# Altium PCB 智能插座2019_1_7.PcbDoc
Units mil, origin at the board's own origin, x right, y up, seen from the top; angles counter-clockwise.
Board outline 3149.61 x 3089.41 mil, 2 copper layers (Top Layer, Bottom Layer); 88 components, 65 nets, 285 pads, 72 vias.
Unrouted connection lines stored in the file: 56.
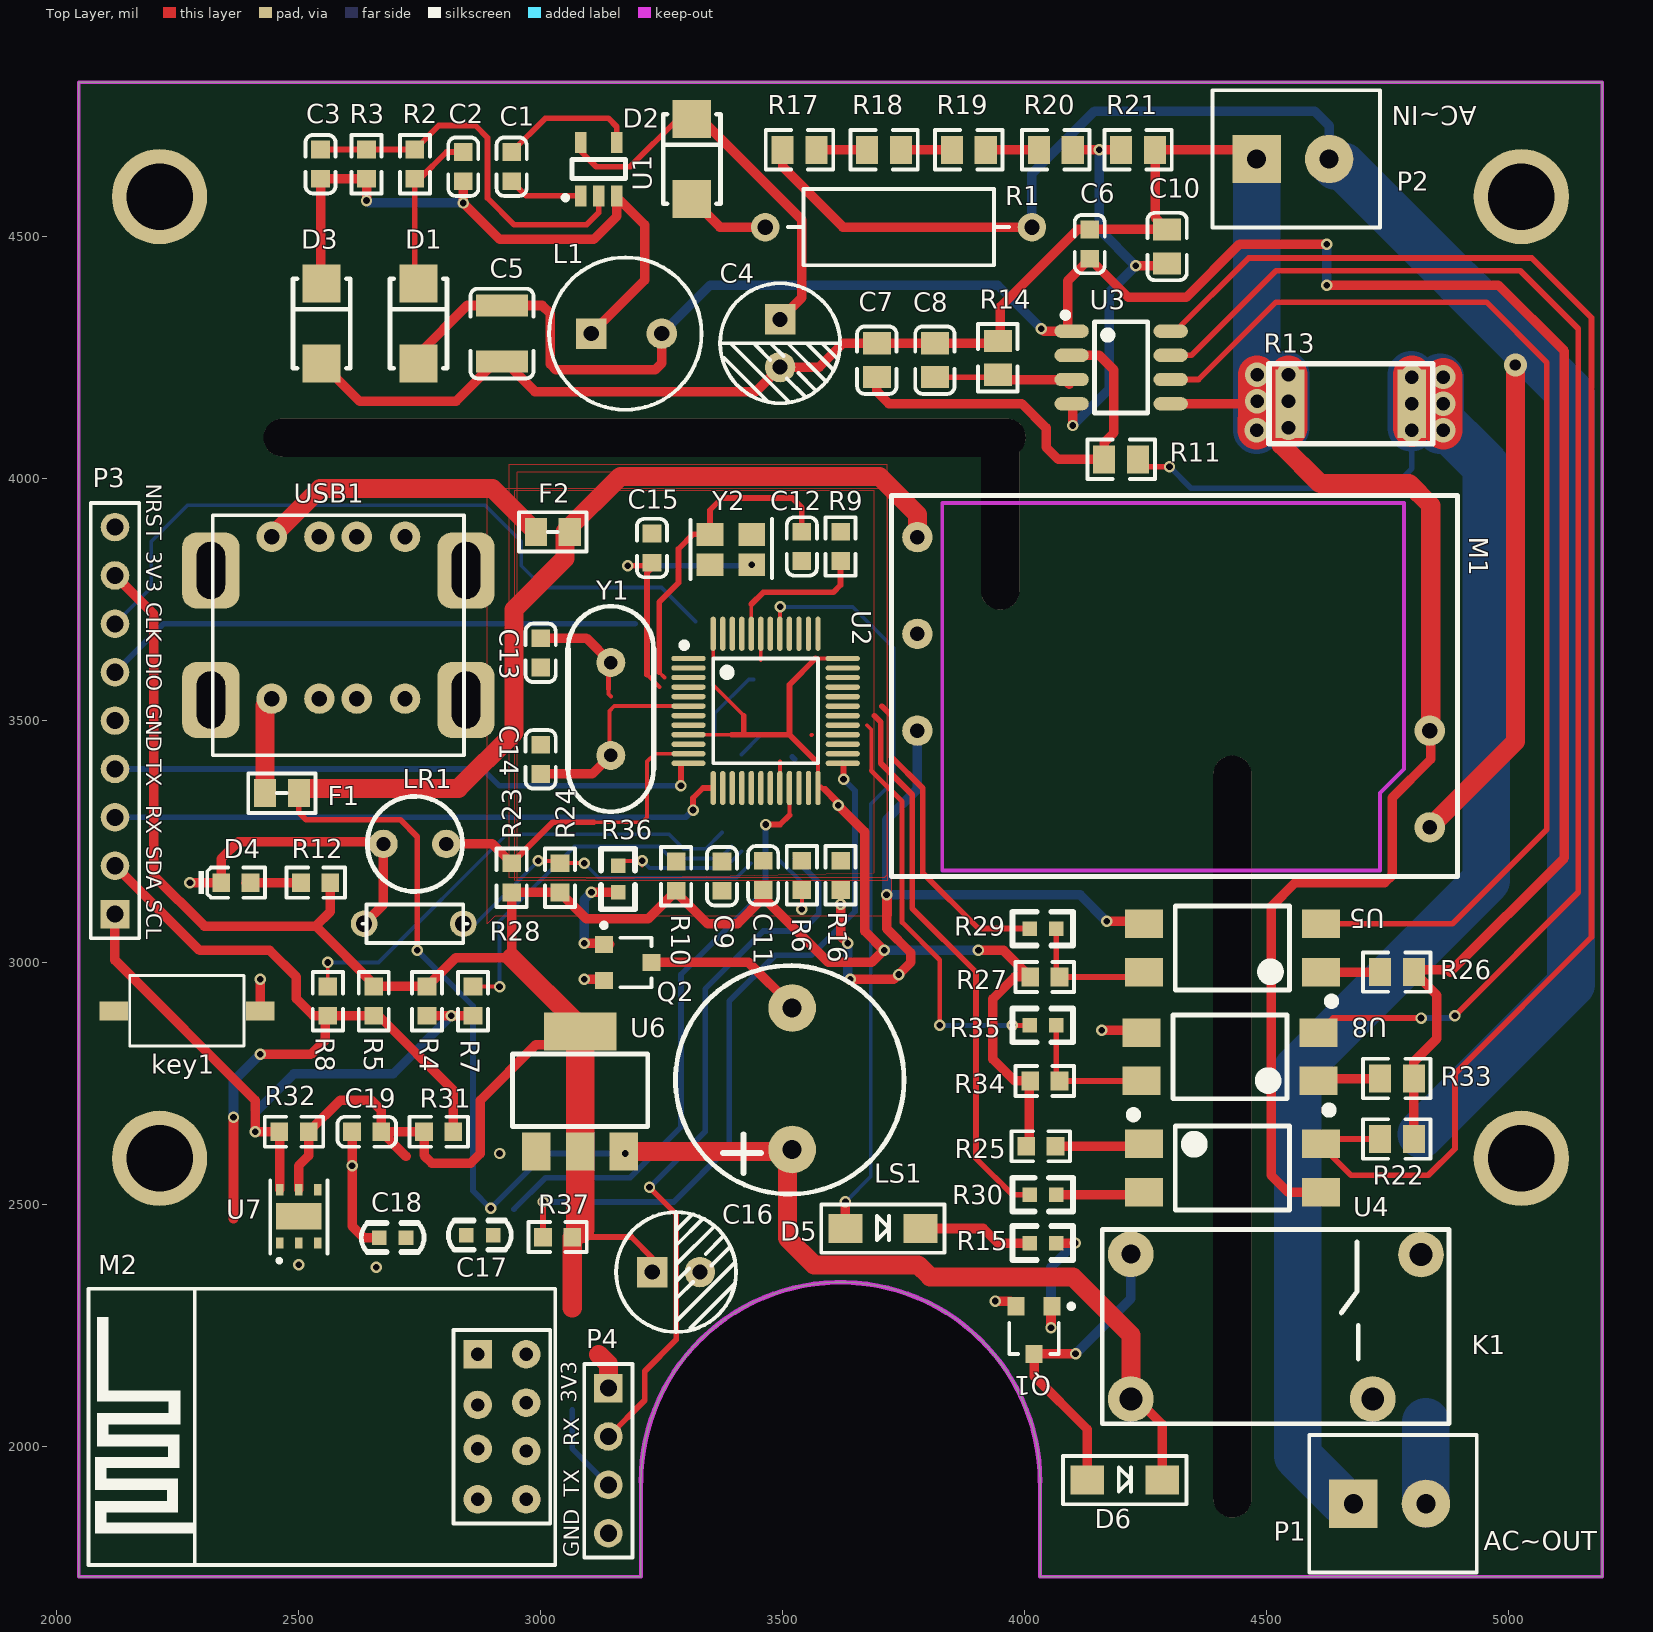
[diagram p0: Top Layer view]
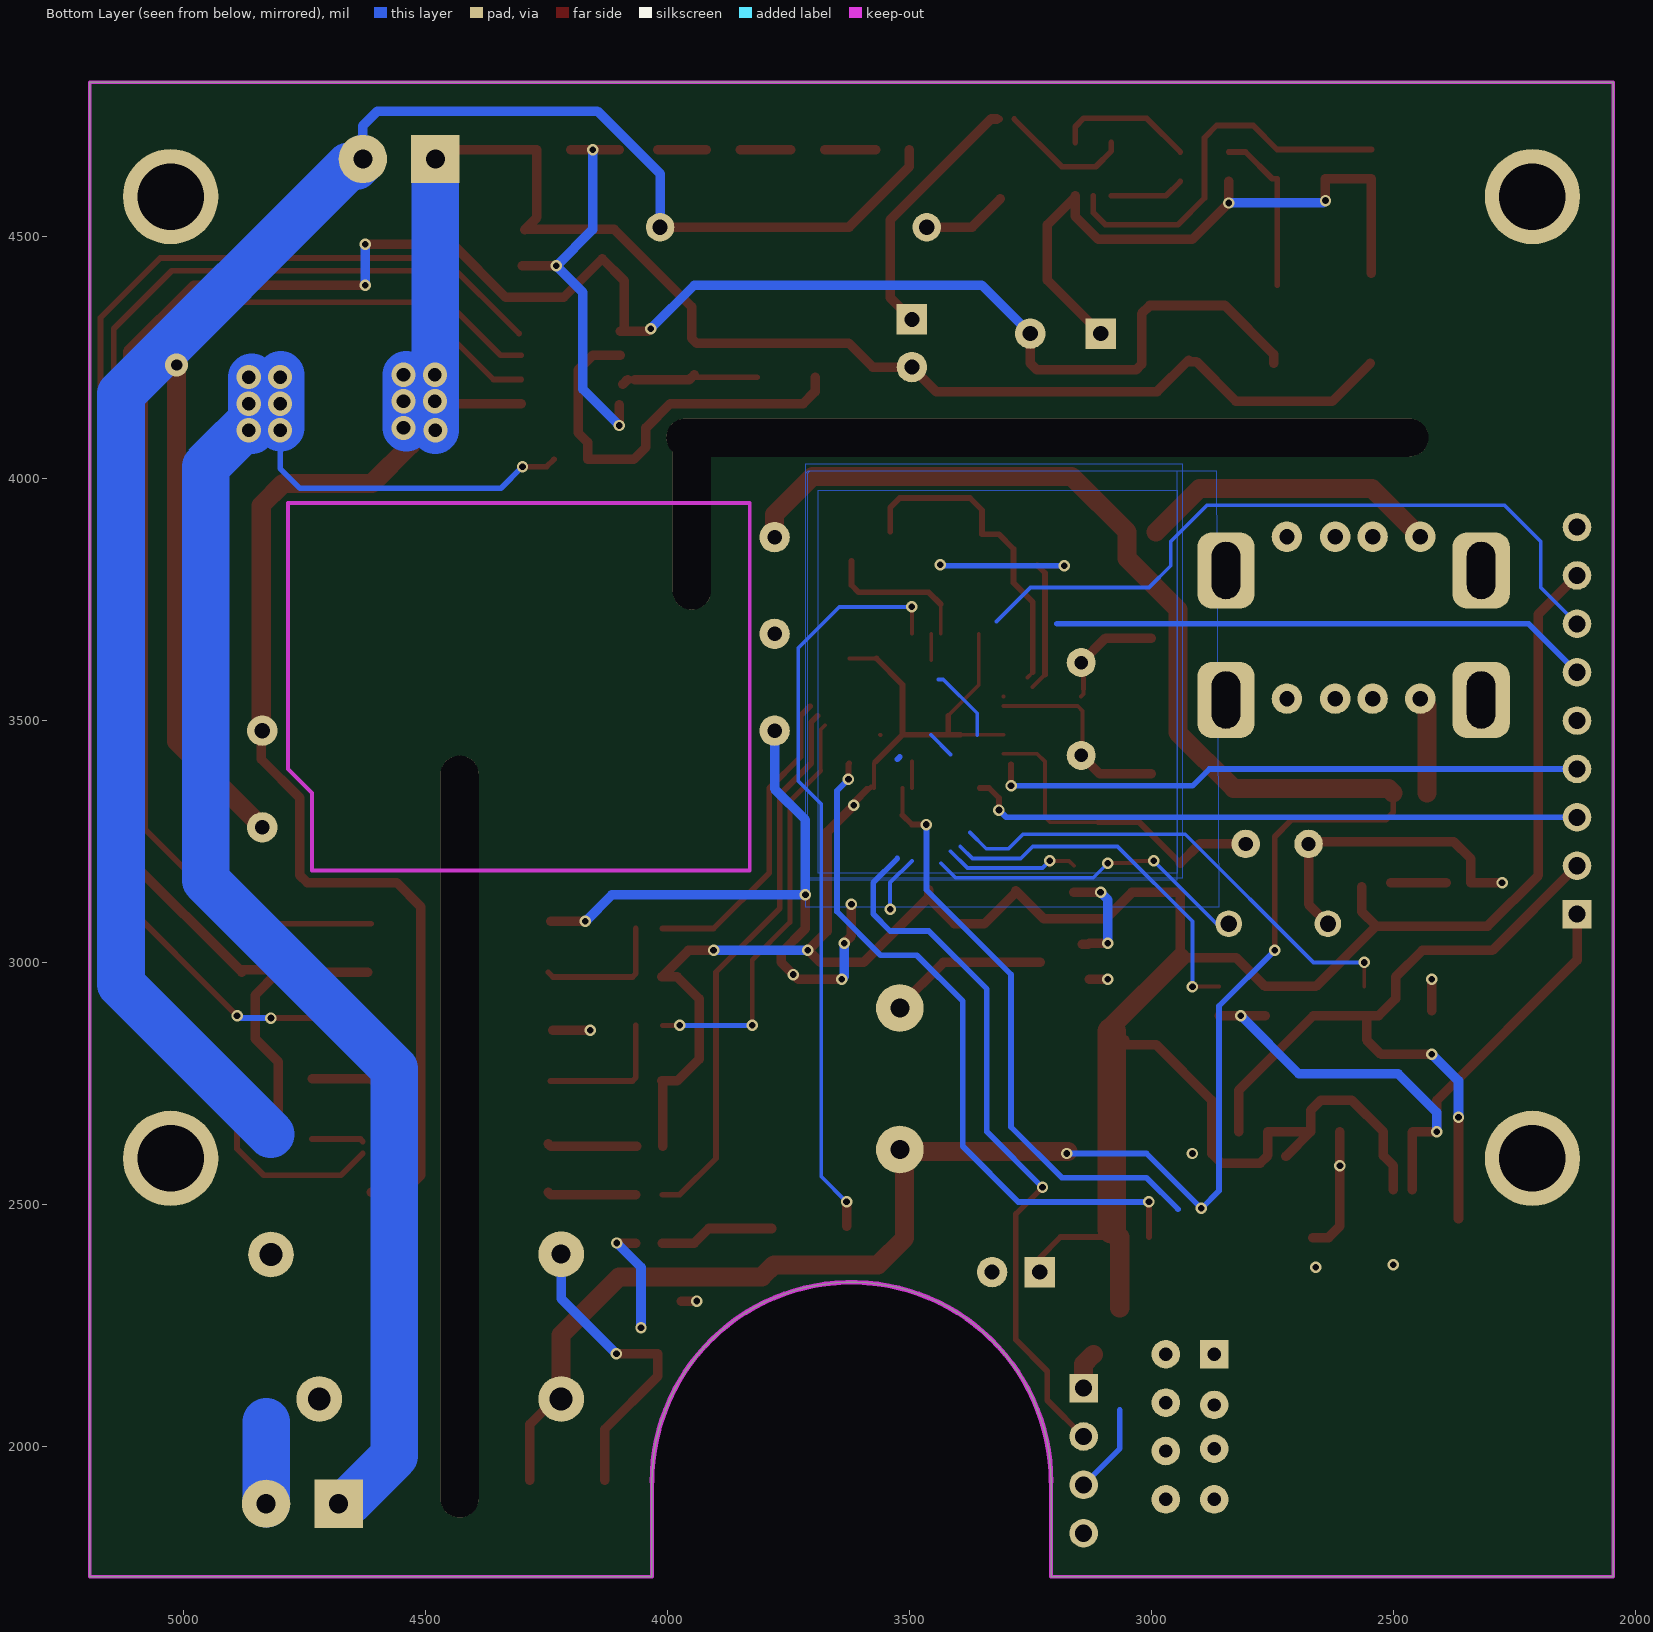
[diagram p1: Bottom Layer view, seen from below]

## Layer stack, top to bottom
Top Solder: solder mask 0.4, Solder Resist, Dk 3.5
Top Layer: signal copper 1.4
Dielectric1: dielectric 12.6, FR-4, Dk 4.8
Bottom Layer: signal copper 1.4
Bottom Solder: solder mask 0.4, Solder Resist, Dk 3.5

## Board outline
2045,1730 2045,4819.41 5194.61,4819.41 5194.61,1730 4032.32,1730 4032.32,1925.71 ccw(c3619.84,1926.42) 3207.36,1925.71 3207.36,1730.04 3207.32,1730

## Design rules (kind name [scope] priority, off if disabled: settings)
Clearance [All] p1: gap=10 ignorepadtopadclearanceinfootprint=FALSE except(0: Arc-Hole Track-Hole SMDPad-Hole THPad-Hole Via-Hole Fill-Hole Poly-Hole Region-Hole Text-Hole)
FabricationTestPointUsage TestPointUsage [All] p1: valid=0 allowmultiple=FALSE
FabricationTestpoint Testpoint [All] p1: side=3 testpointundercomponent=TRUE minsize=40 maxsize=100 preferedsize=60 minholesize=0 maxholesize=40 preferedholesize=32 testpointgrid=1 allowsidetop=TRUE allowsidebottom=TRUE usegrid=TRUE gridtolerance=0.01
PolygonConnect [All] p1: connectstyle=Relief reliefconductorwidth=10 reliefentries=4 polygonreliefangle="90 Angle" airgapwidth=10
RoutingVias [All] p1 off: holewidth=28 width=50 viastyle="Through Hole" minholewidth=28 minwidth=50 maxholewidth=28 maxwidth=50
SolderMaskExpansion [All] p1: expansion=4
Width [All] p1: maxlimit=118.11 minlimit=7.87 preferedwidth=19.68
28 further rules are at their usual default settings.

## Components (designator, comment, footprint, x,y, rotation, side; value= is the part's Value field where it differs from the comment)
C1 "2.2μF/10V" LC-0603_C 2940,4645 r270 top value="100nF (104) ±10% 50V"
C2 "220nF" LC-0603_C 2840,4645 r90 top value="100nF (104) ±10% 50V"
C3 "470pF" LC-0603_C 2545,4650.32 r90 top value="100nF (104) ±10% 50V"
C4 "3.3μF/400V" CAP-ELECT-TH-6.3X7 3495,4280 r270 top value=2.2μF/400V
C5 "100μF" LC-1210_C 2920,4300 r90 top value="100nF (104) ±10% 50V"
C6 "0.1μF" LC-0603_C 4135,4485 r90 top value="100nF (104) ±10% 50V"
C7 "33nF" LC-0805_C 3695,4245 r90 top value="100nF (104) ±10% 50V"
C8 "33nF" LC-0805_C 3815,4245 r270 top value="100nF (104) ±10% 50V"
C9 "0.1μF" LC-0603_C 3375,3178.37 r90 top
C10 "33nF" LC-0805_C 4295,4480 r90 top value="100nF (104) ±10% 50V"
C11 "0.1μF" LC-0603_C 3460,3180 r270 top
C12 "6pF" LC-0603_C 3540,3860 r270 top
C13 "20pF" LC-0603_C 3000,3640 r270 top
C14 "20pF" LC-0603_C 3000,3420 r90 top
C15 "6pF" LC-0603_C 3230,3856.61 r90 top
C16 "1000μF/400V" CAP-ELECT-TH-6.3X7 3280,2360 r0 top value=2.2μF/400V
C17 "104" 0603C 2880,2435 r0 top
C18 "104" 0603C 2700,2430 r0 top
C19 "0.1μF" LC-0603_C 2640.43,2649.96 r0 top
D1 "1N4007" LC-SMA(DO-214AC)_S1 2755,4320 r270 top
D2 "1N4007" LC-SMA(DO-214AC)_S1 3320,4660 r270 top
D3 "US1J(600V 1A)" LC-SMA(DO-214AC)_S1 2555,4320 r270 top
D4 "POWER" LC-0603_LED_S1 2370,3165 r0 top value=红色
D5 "IN4148" 1206D 3580,2420 r90 top
D6 "" 1206D 4080,1900 r90 top
F1 "1.1A  自恢复保险丝" AFUSE 2460,3360 r180 top
F2 "1.1A  自恢复保险丝" AFUSE 3020,3900 r180 top
K1 "Relay-5V" SJ-S-105LMH 4220,2200 r0 top
key1 "SW" KEY-2 2420,2900 r180 top
L1 "1mH" L-10X14 3175,4300 r0 top
LR1 "光敏电阻" GUANGMIN 2740,3245 r180 top
LS1 "BUZZER 5V" BUZZER 3520,2760 r270 top
M1 "ACDC_THX208based" ACDC_THX208 4895,3180 r180 top
M2 "ESP-01&01S Module" "ESP-01&01S Module" 2920,2040 r90 top
P1 "Header" 3.81-2P 4680,1880 r0 top
P2 "Header" 3.81-2P 4480,4660 r0 top
P3 "Header 9" HDR1X9 2120,3100 r90 top
P4 "Header 4" HDR1X4 3140,2120 r270 top
Q1 "S8050" SOT-23 4020,2240 r180 top
Q2 "S8050" SOT-23 3180,3000 r270 top
R1 "39Ω/1W" R-1W-THT 3740,4520 r180 top
R2 "5.49KΩ" LC-0603_R 2740,4650.32 r270 top
R3 "4.99KΩ" LC-0603_R 2640,4650.31 r90 top
R4 "4.7KΩ" LC-0603_R 2765,2920 r270 top
R5 "4.7KΩ" LC-0603_R 2655,2920 r270 top
R6 "10KΩ" LC-0603_R 3540,3180 r270 top
R7 "100" LC-0603_R 2860,2920 r90 top
R8 "100" LC-0603_R 2560,2920 r90 top
R9 "10KΩ" LC-0603_R 3620,3860 r90 top
R10 "10KΩ" LC-0603_R 3280,3178.37 r270 top
R11 "1KΩ,1%" LC-0805_R 4200,4040 r0 top
R12 "1.5KΩ" LC-0603_R 2535,3165 r0 top
R13 "2mΩ/25A" R2512 4675,4155 r180 top
R14 "1KΩ,1%" LC-0805_R 3945,4250 r90 top
R15 "Res2" 0603 4065.61,2420 r180 top value=4.7K
R16 "0Ω" LC-0603_R 3620,3180 r90 top
R17 "470KΩ,1%" LC-0805_R 3535,4680 r180 top
R18 "470KΩ,1%" LC-0805_R 3710,4680 r180 top
R19 "470KΩ,1%" LC-0805_R 3885,4680 r180 top
R20 "470KΩ,1%" LC-0805_R 4065,4680 r180 top
R21 "1KΩ,1%" LC-0805_R 4235,4680 r0 top
R22 "1KΩ,1%" LC-0805_R 4769.96,2635 r0 top
R23 "10KΩ 1%" LC-0603_R 2940,3175 r270 top
R24 "10KΩ 1%" LC-0603_R 3040,3175 r270 top
R25 "2.2KΩ" LC-0603_R 4033.99,2620 r180 top
R26 "1KΩ,1%" LC-0805_R 4769.96,2980 r0 top
R27 "2.2KΩ" LC-0603_R 4042.25,2970 r180 top
R28 "MF52-10K   3950 1％" AXIAL-0.3 2740,3080 r180 top value=MF52-10K
R29 "0Ω/1W" 0603 4065.61,3070 r180 top
R30 "0Ω/1W" 0603 4010.61,2520 r0 top
R31 "10KΩ" LC-0603_R 2789.17,2649.96 r0 top
R32 "10KΩ" LC-0603_R 2490,2650 r180 top
R33 "1KΩ,1%" LC-0805_R 4769.96,2760 r0 top
R34 "2.2KΩ" LC-0603_R 4042.25,2755 r180 top
R35 "0Ω/1W" 0603 4065.61,2870 r180 top
R36 "4.7K" 0603 3160,3200 r270 top
R37 "4.7KΩ" LC-0603_R 3035,2432.22 r0 top
U1 "MP150" LC-SOT-23-5 3120,4640 r270 top
U2 "STM32F103C8T6" LC-LQFP-48_7x7x05P 3465,3520 r270 top
U3 "HLW8032" LC-SOP-8_150mil 4200,4230 r270 top
U4 "PC817" LC-SMD-4 4430,2575 r0 top
U5 "PC817" LC-SMD-4 4430,3030 r180 top
U6 "LM1117-3.3V" SOT-223/P2.3 3080,2720 r90 top
U7 "SHT1" SHT2X 2500,2420 r0 top
U8 "PC817" LC-SMD-4 4425,2805 r180 top
USB1 "2_USB" 2_USB 2600,3880 r180 top
Y1 "8M" 49/U_N 3145,3620 r270 top value="25MHz ±20ppm 20pF"
Y2 "32.768K" 0SC_3225 3390,3860 r180 top

## Footprints (in the part's own frame and the unit in brackets; to place one, negate y for a bottom-side part, rotate by r counter-clockwise, add the part's x,y. Pads: shape width x height; smd on the part's side, far side on the other; paste and mask are expansions set on the pad)
0SC_3225 [mm]
  rect 1.4x1.2 smd: 1(-1.184,0.965) 2(1.016,-0.635) GND(-1.184,-0.635) GND(1.016,0.965)
  silkscreen extent -2.24,-1.45 2.03,1.7
2_USB [mm]
  rrect50% 3x4 hole 1.5 slot 3 at 90 deg: 0(-6.24,8.57) 0(-6.24,1.77) 0(7.16,8.57) 0(7.16,1.77)
  round 1.6 hole 0.8: 1(3.96,8.5) 2(-0.508,8.5) 3(1.46,8.5) 4(-3.04,8.5) 5(3.96,0) 6(-0.508,0) 7(1.46,0) 8(-3.04,0)
  silkscreen extent -6.14,-1.13 7.06,11.47
3.81-2P [mil]
  rect 100x100 hole 39.37: 1(0,0.99)
  round 100 hole 39.37: 2(150,1)
  silkscreen extent -91,-141 255,143
49/U_N [mil]
  round 60 hole 28: 1(0,0) 2(192,0)
  silkscreen extent -116,-88 308,89, body extent -117,-88 309,89, height 512
0603 [mil]
  rect 30x30 smd: 1(0,0) 2(55,0)
  silkscreen extent -35,-35 90,35
0603C [mil]
  rect 30x30 smd: 1(21.61,1.26) 2(-33.39,1.26)
  silkscreen extent -71,-29 59,31
1206D [mil]
  rect 60x70 smd: 1(30,-50) 2(30,-205)
  silkscreen extent -20,-255 80,0
ACDC_THX208 [mm]
  round 1.6 hole 0.762: 1(1.45,-2.52) 3(28.35,-7.6) 4(28.35,-12.68) 5(28.35,-17.76)
  round 1.6 hole 0.8: 2(1.45,-7.6)
  silkscreen extent 0,-19.94 29.72,0.06
AFUSE [mm]
  rect 1.16x1.47 smd: 1(-1.017,0.254) 2(0.763,0.254)
  silkscreen extent -1.9,-0.78 1.64,1.29, body extent -1.12,-0.37 0.88,0.88, height 0.49
AXIAL-0.3 [mm] "Resistor; 2 Leads"
  round 1.4 hole 0.85: 1(-2.54,0) 2(2.667,0)
  silkscreen extent -2.77,-1.02 2.77,1.02
BUZZER [mm]
  round 2.5 hole 1: 1(3.728,0) 2(-3.703,0)
  silkscreen extent -5.93,-6.12 6.07,5.87
CAP-ELECT-TH-6.3X7 [mm]
  rect 1.6x1.6 hole 0.8: 1(-1.25,0)
  round 1.6 hole 0.8: 2(1.25,0)
  silkscreen extent -3.15,-3.15 3.15,3.15
"ESP-01&01S Module" [mm]
  rect 1.5x1.5 hole 0.7: 1(3.81,1.27)
  round 1.5 hole 0.7: 2(1.15,1.27) 3(-1.15,1.27) 4(-3.81,1.27) 5(3.81,-1.27) 6(1.27,-1.27) 7(-1.27,-1.27) 8(-3.81,-1.27)
  silkscreen extent -7.25,-2.79 7.25,21.71
GUANGMIN [mm]
  round 1.5 hole 0.75: 1(-1.651,0) 2(1.651,0)
  silkscreen extent -2.5,-2.5 2.5,2.5
HDR1X4 [mm] "Connector; Header; 4 Position"
  rect 1.5x1.5 hole 0.9: 1(0,0)
  round 1.5 hole 0.9: 2(2.54,0) 3(5.08,0) 4(7.62,0)
  silkscreen extent -1.27,-1.27 8.89,1.27
HDR1X9 [mm] "Connector; Header; 9 Position"
  rect 1.5x1.5 hole 0.9: 1(0,0)
  round 1.5 hole 0.9: 2(2.54,0) 3(5.08,0) 4(7.62,0) 5(10.16,0) 6(12.7,0) 7(15.24,0) 8(17.78,0) 9(20.32,0)
  silkscreen extent -1.27,-1.27 21.59,1.27
KEY-2 [mm]
  rect 1.5x1 smd: 1(-0.005,-0.001) 2(7.685,-0.001)
  silkscreen extent 0.85,-1.85 6.85,1.86
L-10X14 [mm]
  rect 1.6x1.6 hole 0.8: 1(-1.786,0)
  round 1.6 hole 0.8: 2(1.913,0)
  silkscreen extent -4,-4 4,4
LC-0603_C [mm]
  rect 0.93x0.98 smd: 1(-0.77,0) 2(0.77,0)
  silkscreen extent -1.54,-0.79 1.54,0.79, body extent -0.8,-0.4 0.8,0.4, height 0.3
LC-0603_LED_S1 [mm]
  rect 0.93x0.98 smd: A(0.77,0) K(-0.77,0)
  silkscreen extent -1.97,-0.79 1.53,0.79, body extent -0.8,-0.4 0.8,0.4, height 0.6
LC-0603_R [mm]
  rect 0.93x0.98 smd: 1(-0.77,0) 2(0.77,0)
  silkscreen extent -1.53,-0.79 1.54,0.79, body extent -0.85,-0.4 0.85,0.4, height 0.56
LC-0805_C [mm]
  rect 1.16x1.47 smd: 1(-0.89,0) 2(0.89,0)
  silkscreen extent -1.77,-1.04 1.77,1.04, body extent -1,-0.62 1,0.63, height 0.77
LC-0805_R [mm]
  rect 1.16x1.47 smd: 1(-0.89,0) 2(0.89,0)
  silkscreen extent -1.77,-1.03 1.77,1.04, body extent -1,-0.62 1,0.63, height 0.49
LC-1210_C [mm]
  rect 1.16x2.72 smd: 1(-1.475,0) 2(1.475,0)
  silkscreen extent -2.36,-1.66 2.35,1.66, body extent -1.6,-1.25 1.6,1.25, height 1.3
LC-LQFP-48_7x7x05P [mm]
  oval 0.28x1.8 smd: 1(-2.75,-4.05) 2(-2.25,-4.05) 3(-1.75,-4.05) 4(-1.25,-4.05) 5(-0.75,-4.05) 6(-0.25,-4.05) 7(0.25,-4.05) 8(0.75,-4.05) 9(1.25,-4.05) 10(1.75,-4.05) 11(2.25,-4.05) 12(2.75,-4.05) 25(2.75,4.05) 26(2.25,4.05) 27(1.75,4.05) 28(1.25,4.05) 29(0.75,4.05) 30(0.25,4.05) 31(-0.25,4.05) 32(-0.75,4.05) 33(-1.25,4.05) 34(-1.75,4.05) 35(-2.25,4.05) 36(-2.75,4.05)
  oval 1.8x0.28 smd: 13(4.05,-2.75) 14(4.05,-2.25) 15(4.05,-1.75) 16(4.05,-1.25) 17(4.05,-0.75) 18(4.05,-0.25) 19(4.05,0.25) 20(4.05,0.75) 21(4.05,1.25) 22(4.05,1.75) 23(4.05,2.25) 24(4.05,2.75) 37(-4.05,2.75) 38(-4.05,2.25) 39(-4.05,1.75) 40(-4.05,1.25) 41(-4.05,0.75) 42(-4.05,0.25) 43(-4.05,-0.25) 44(-4.05,-0.75) 45(-4.05,-1.25) 46(-4.05,-1.75) 47(-4.05,-2.25) 48(-4.05,-2.75)
  silkscreen extent -3.6,-4.42 2.75,2.75
LC-SMA(DO-214AC)_S1 [mm]
  rect 2x2 smd: 1(2.076,-0.194) 2(-2.124,-0.194)
  silkscreen extent -2.37,-1.69 2.33,1.31
LC-SMD-4 [mm]
  rect 2x1.5 smd: 1(-4.65,1.27) 2(-4.65,-1.27) 3(4.65,-1.27) 4(4.65,1.27)
  silkscreen extent -5.4,-2.2 3,3, body extent -5.02,-2.42 5.01,2.42, height 3.9
LC-SOP-8_150mil [mm]
  oval 0.7x1.8 smd: 1(-1.905,-2.6) 2(-0.635,-2.6) 3(0.635,-2.6) 4(1.905,-2.6) 5(1.905,2.6) 6(0.635,2.6) 7(-0.635,2.6) 8(-1.905,2.6)
  silkscreen extent -2.9,-3.07 2.4,1.4, body extent -2.5,-3.1 2.5,3.1, height 1.75
LC-SOT-23-5 [mm]
  rect 1.1x0.6 smd: 1(1.4,-0.95) 2(1.4,0) 3(1.4,0.95) 4(-1.4,0.95) 5(-1.4,-0.95)
  silkscreen extent -0.5,-1.87 1.62,1.4
R2512 [mm]
  rect 1.5x3.6 smd: 1(-3.2,0) 2(3.2,0)
  silkscreen extent -4.3,-2.1 4.3,2.1
R-1W-THT [mm]
  round 1.5 / inner oval 1.5x2 / far side round 1.5 hole 0.8: 1(-7,0)
  round 1.5 hole 0.8: 2(7,0)
  silkscreen extent -5.8,-2 5.8,2
SHT2X [mm]
  rect 2.4x1.4 smd: 0(0,1.4)
  rect 0.4x0.6 smd: 1(-1,0) 2(0,0) 3(1,0) 4(1,2.8) 5(0,2.8) 6(-1,2.8)
  silkscreen extent -1.5,-0.95 1.5,3.3
SJ-S-105LMH [mm]
  round 2.4 hole 1: 1(0,5)
  round 2.4 hole 1.2: 2(0,-2.6) 3(15.24,4.984) 4(12.7,-2.6)
  silkscreen extent -1.5,-3.9 16.7,6.3
SOT-23 [mm] "SOT-23; 3 Leads; Body 3.0 x 2.6 mm, inc. leads (LxW max)"
  rect 0.9x0.95 smd: 1(-0.95,-1.25) 2(0.95,-1.25) 3(0,1.25)
  silkscreen extent -2.08,-1.37 1.3,1.25
SOT-223/P2.3 [mil]
  rect 79x59 smd: 1(-111,89.1) 2(-111,-1.45) 3(-111,-92)
  rect 79x150 smd: 2(137,-1.9)
  silkscreen extent -59,-141 91,139

## Part data
C1 C2 C3 C5 C6 C7 C8 C10: library part CAP, "贴片电容"
C4 C16: library part "Cap Pol1", "直插电解电容", LatestRevisionDate=17-Jul-2002, LatestRevisionNote="Re-released for DXP Platform.", PackageReference=RB7.6-15, Published=8-Jun-2000, Publisher="Altium Limited"
C9 C11 C12 C13 C14 C15 C19: library part Cap, "贴片电容", 名称=电容, 型号=1μF, 封装=0805
C17 C18: library part CAP, "Capacitor"
D1 D2 D3: library part "Diode 1N5408", "贴片二极管", ComponentLink1Description="Manufacturer Link", ComponentLink1URL=http://www.irf.com/, DatasheetDocument=Aug-1984, LatestRevisionDate=17-Jul-2002, LatestRevisionNote="Re-released for DXP Platform.", PackageReference=DO-201AD, Published=8-Jun-2000, Publisher="Altium Limited"
D4: library part LED1, "发光二极管"
D5 D6: library part Diode, "Default Diode", PackageDocument=Sep-1996, Code_JEDEC=DO-214-AB, LatestRevisionDate=17-Jul-2002, LatestRevisionNote="Re-released for DXP Platform.", PackageReference=SMC, Published=8-Jun-2000, Publisher="Altium Limited"
F1 F2: library part "Fuse 2", "Fuse", LatestRevisionDate=17-Jul-2002, LatestRevisionNote="Re-released for DXP Platform.", PackageReference=PIN-W2/E2.8, Published=8-Jun-2000, Publisher="Altium Limited"
K1: library part SJ-S-105LMH, "Single-Pole Dual-Throw Relay", LatestRevisionDate=17-Jul-2002, LatestRevisionNote="Re-released for DXP Platform.", PackageReference=MODULE5B, Published=24-Mar-1999, Publisher="Altium Limited"
key1: "Switch", LatestRevisionDate=17-Jul-2002, LatestRevisionNote="Re-released for DXP Platform.", PackageReference=SPST-2, Published=24-Mar-1999, Publisher="Altium Limited"
L1: library part IND_8, "直插绕线电感", AtherosDescription="IND,SMT,SHIELDING CHOKE,10uH,7.3x7.3", ATHEROS KEY=078-100LM-000, CISPartType=Inductor\Ferrite, OriginalSymbolOrigin=(0,0)
LS1: library part Bell, "Electrical Bell", LatestRevisionDate=17-Jul-2002, LatestRevisionNote="Re-released for DXP Platform.", PackageReference=PIN2, Published=24-Mar-1999, Publisher="Altium Limited"
M1: library part ACDC, "THX208Based"
P1 P2: library part "Header 2", "Header, 2-Pin", LatestRevisionDate=17-Jul-2002, LatestRevisionNote="Re-released for DXP Platform.", Publisher="Altium Limited"
P3: "Header, 9-Pin", LatestRevisionDate=17-Jul-2002, LatestRevisionNote="Re-released for DXP Platform.", Publisher="Altium Limited"
P4: "Header, 4-Pin", LatestRevisionDate=17-Jul-2002, LatestRevisionNote="Re-released for DXP Platform.", Publisher="Altium Limited"
Q1 Q2: library part NPN, "NPN Bipolar Transistor", Code_JEDEC=TO-226-AA, LatestRevisionDate=17-Jul-2002, LatestRevisionNote="Re-released for DXP Platform.", PackageReference=TO-226, Published=8-Jun-2000, Publisher="Altium Limited"
R1 R2 R3 R4 R5 R6 R7 R8 R9 R10 R11 R12 R13 R14 R16 R17 R18 R19 R20 R21 R22 R23 R24 R25 R26 R27 R29 R30 R31 R32 R33 R34 R35: library part 电阻, "贴片电阻", 名称=电阻
  R1 R2 R3 R4 R5 R6 R7 R9 R10 R11 R12 R13 R14 R16 R17 R18 R19 R20 R21 R22 R23 R24 R25 R26 R27 R29 R30 R31 R32 R33 R34 R35: 型号=1KΩ
  R8: 型号=100
R15: "Resistor", LatestRevisionDate=17-Jul-2002, LatestRevisionNote="Re-released for DXP Platform.", PackageReference=AXIAL-0.4, Published=8-Jun-2000, Publisher="Altium Limited"
R28: library part "Res Adj2", "Variable Resistor", LatestRevisionDate=17-Jul-2002, LatestRevisionNote="Re-released for DXP Platform.", PackageReference=AXIAL-0.6, Published=8-Jun-2000, Publisher="Altium Limited", Set Position=0.5
R36: library part Res2, "Resistor", LatestRevisionDate=17-Jul-2002, LatestRevisionNote="Re-released for DXP Platform.", PackageReference=0805, Published=8-Jun-2000, Publisher="Altium Limited"
R37: library part "0805 62KΩ (6202) 1%", "贴片电阻", Package=0402, SuppliersPartNumber=C17783, ComponentLink1Description=供应商链接, ComponentLink1URL=http://www.szlcsc.com/product/details_18471.html, Supplier=LC
U1 U3: "IC"
U2: library part STM32F103CBT6, "IC", ComponentLink1Description="Manufacturer Link", ComponentLink1URL=www.st.com/stm32, ComponentLink2Description=Datasheet, ComponentLink2URL=http://www.st.com/stonline/products/literature/ds/13587.pdf, DatasheetVersion="rev6, Mar-2008", PackageDescription="48-Pin Low-Profile Quad Flat Pack, 7 x 7 mm Body, 0.5 mm Pitch (LQFP48)", PackageReference=LQFP48, PackageVersion=Mar-2008, Published=30-May-2008, Publisher="Altium Limited", 厂商=ST, 名称=IC, 型号=STM32F103CBT6, 封装=LQFP48
U4 U5 U8: library part PS2501L-1-F3-A, "IC"
U6: library part 1117
U7: library part SHT21
Y1: library part XTAL_1, "晶振（直插）", LatestRevisionDate=17-Jul-2002, LatestRevisionNote="Re-released for DXP Platform.", PackageReference=R38, Published=8-Jun-2000, Publisher="Altium Limited"
Y2: library part XTAL, "Crystal Oscillator", LatestRevisionDate=17-Jul-2002, LatestRevisionNote="Re-released for DXP Platform.", PackageReference=R38, Published=8-Jun-2000, Publisher="Altium Limited"

## Free pads (board coordinates)
  round 196.85 hole 137.8: 0(2212.32,2595) 0(2212.32,4583.19) 0(5027.28,2595) 0(5027.28,4583.19)
  oval 1574.8x78.74 hole 78.74 slot 1574.8 at 0 deg unplated paste+0: 0(3215,4085)
  oval 78.74x393.7 hole 78.74 slot 393.7 at 90 deg unplated paste+0: 0(3950,3926.14)
  oval 78.74x1574.8 hole 78.74 slot 1574.8 at 90 deg unplated paste+0: 0(4430,2640)

## Via types
v1: diameter 23.62, hole 13.78, Top Layer to Bottom Layer, 59 vias
v2: diameter 50, hole 28, Top Layer to Bottom Layer, 12 vias
v3: diameter 47.24, hole 23.62, Top Layer to Bottom Layer, 1 vias

## Nets (pads, with @x,y where several pads share a name; then routed paths per layer and width w, separated by ;. In a path a pad name is that pad's centre, name@x,y a point inside that pad or via, vN(x,y) a via of type N, cw(c..) or ccw(c..) an arc to the next point about the centre after c; other vN are vias at no path point)
+3.3V: C11.2 C16.1 C18.1 C19.2 M2.5 P3.8 P4.1 R4.1 R5.1 R10.2 R12.2 R23.2 R24.2 R25.2 R27.2 R31.1 R32.1 R34.2 R37.2 U2.9 U2.24 U2.36 U2.48 U6.2 U7.5 | length 6855.6
  Top Layer w7.87: U2.9 3395,3470.79 ; U2.48 3356.73,3573.27 3420,3510 ; 3568.27,3628.27 U2.36 ; 3570,3415 3573.27,3411.73 U2.24 ; 3579.45,3360.55 3579.45,3363.82 3582.72,3360.55 3589.45,3360.55 v1@3615,3335 ; 3581.08,3358.92 v1(3615,3325)
  Top Layer w11.81: R37.2 3187.78,2432.22 3230.79,2389.21 C16.1 ; 3395,3470.79 3514.21,3470.79 ; 3420,3470.79 3420,3510 ; 3568.27,3628.27 3514.21,3574.21 3514.21,3470.79 ; 3570,3415 3514.21,3470.79
  Top Layer w19.68: P3.8 2200,3720 2200,3180 2305,3075 2535,3075 ; U7.5 2500,2580 2520.31,2600.31 R32.1 2585.31,2715 2650,2715 2670.75,2694.25 C19.2 ; R12.2@2565.32,3156.18 2565.32,3105.32 2535,3075 ; 2721.61,2599.09 C19.2 ; R23.2 R24.2 3094.68,3090 3221.94,3090 R10.2 ; R23.2@2940,3145 2940,3010 2824.68,3010 R4.1 2659.68,2950.32 2535,3075 ; U6.2@3055,2840 3055,2830 2990,2830 2875,2715 2875,2605 2855,2585 2775,2585 2758.86,2601.14 R31.1 C19.2 ; U6.2@3081.45,2845 U6.2@3081.45,2868.55 ; R10.2@3280,3145 3345,3080 3406.94,3080 C11.2@3460,3133.06 ; C11.2@3460,3150 3460,3135 3595,3000 3683.99,3000 v1@3708.99,3025 ; v1(3615,3325) 3670,3270 3670,3065 v1(3710,3025) ; v1(3905,3025) 3956.93,3025 R27.2 3980,2970 3935,2925 3935,2800 3980,2755 R34.2 4010,2753.07 R25.2@4010,2620
  Top Layer w39.37: 2940,3010 U6.2@3081.45,2868.55 ; 3065.32,2285.32 R37.2 R37.2@3081.45,2448.35 ; U6.2@3081.45,2856.55 U6.2@3081.9,2857 ; 3120,2190 3140,2170 P4.1
  Top Layer w59.06: R37.2@3081.45,2448.35 U6.2@3081.45,2856.55
  Bottom Layer w19.68: v1(3710,3025) v1(3905,3025)
+5V: C17.1 D6.2 F1.1 F2.1 K1.2 LS1.1 M1.5 U6.3 | length 4936.5
  Top Layer w11.81: F1.1 2500.04,3310 2515.04,3295 2710,3295 2745,3260 v1(2745,3025) ; v1(2896.61,2491.61) v1@2900,2495
  Top Layer w19.68: K1.2 4232.36,2097.64 4285,2045 D6.2
  Top Layer w39.37: F1.1 2510.04,3360 2830,3360 2945,3475 2945,3730 3050,3835 3050,3890 3165,4005 3700,4005 3778.86,3926.14 M1.5 ; U6.3 LS1.1@3515.78,2609 ; LS1.1 3510,2603.22 3510,2430 3565,2375 3780,2375 3805,2350 4100,2350 4220,2230 K1.2
  Bottom Layer w11.81: v1(2745,3025) 2860,2910 2860,2528.23 v1(2896.61,2491.61) 3010,2605 v1(3175,2605)
A+5V: C5.2 C6.1 D1.1 L1.2 R22.2 R26.2 R33.2 U3.1 | length 4881.1
  Top Layer w19.68: D1.1 2747.36,4257.36 2848.07,4358.07 C5.2 3003.07,4358.07 3020,4341.14 3020,4236.53 3031.53,4225 3236.73,4225 3250,4238.27 3250,4238.66 3250.32,4238.98 L1.2 ; v1(4035,4310) 4040,4305 U3.1 ; U3.1@4090,4305 4090,4409.68 C6.1 4214.68,4375 4335,4375 4445,4485 v1(4625,4485) ; v1(4625,4400) 4980,4400 5116.25,4263.75 5116.25,3216.25 4880,2980 ; R22.2 4805,2795 4852.76,2842.76 4852.76,2932.24 R26.2 ; R26.2@4810,2985 4880,2985
  Bottom Layer w19.68: L1.2 3350.31,4400 3945,4400 v1(4035,4310) ; v1(4625,4400) v1(4625,4485)
AC220V-L: K1.4 M1.1 P2.2 R1.1 R17.2 | length 4851.3
  Top Layer w19.68: R17.2 3499.96,4645.04 3625,4520 R1.1
  Top Layer w39.37: M1.1 5015,3456.3 v3(5015,4235)
  Bottom Layer w19.68: R1.1 4015.59,4630.59 4145,4760 4600,4760 4630,4730 P2.2
  Bottom Layer w98.43: P2.2 4645,4646 4659,4646 5130,4175 5130,2955 4820,2645
AC220V-N: C4.2 C5.1 C6.2 C7.2 C8.1 C10.2 D3.1 M1.2 P2.1 R13.2 R14.2 R21.2 U3.5 U4.3 | length 5724
  Top Layer w19.68: D3.1 2625.63,4160 2825,4160 2906.93,4241.93 C5.1 ; C5.1@2923.07,4245 2988.07,4180 3445,4180 3495,4230 C4.2 3575.78,4230.78 3625.04,4280.04 C8.1 3940,4280.04 3950,4290.04 3950,4355 4110.31,4515.31 C10.2@4294.73,4515.31 ; C10.2 4270,4540.04 R21.2 4460.99,4680 P2.1 ; U3.5 v2@4473.33,4155 ; U4.3 4545,2525 4510,2560 4510,3115 4560,3165 4745,3165 4760,3180 4760,3340 4840,3420 4840,3477.13 M1.2
  Top Layer w39.37: 4530.98,4070 4610.98,3990 4795,3990 4840,3945 M1.2@4840,3480
  Top Layer w78.74: v2(4480,4100) 4480.47,4154.94 4480.51,4160 v2(4480.98,4215) ; v2(4545.98,4105) v2(4545.98,4215)
  Top Layer w98.43: v2@4495,4145 R13.2@4520,4120
  Bottom Layer w98.43: v2(4480,4100) 4480.51,4160 v2(4480.98,4215) ; v2@4480,4110 P2.1 ; v2@4540,4105 v2@4540,4215
  other v2: 4480.98,4160 4545.98,4160
ADC_IN1: LR1.1 R23.1 U2.11 | length 678.3
  Top Layer w7.87: 3110,3290 3210,3290 3220,3300 3220,3415.23 3236.18,3431.42 U2.11
  Top Layer w11.81: R23.1@2940.16,3205.16 3025,3290 3110,3290
  Top Layer w19.68: LR1.1 2900.31,3245 R23.1@2940.16,3205.16
ADC_IN8: R24.1 R28.1 U2.18 | length 675.3
  Top Layer w7.87: v1(2995,3210) 3035.31,3210 R24.1 v1@3089.69,3205.31
  Bottom Layer w7.87: R28.1 2865,3080 v1(2995,3210) ; v1(3090,3205) 3120,3175 3405,3175 3435,3205
BOOT0: R9.1 U2.44 | length 311.6
  Top Layer w7.87: U2.44 3435.47,3740.47
  Top Layer w11.81: 3435.47,3740.47 3460,3765 3605,3765 3620,3780 R9.1
CTL_PIN: D5.1 U2.41 | length 1561.7
  Top Layer w7.87: U2.41 v1@3494.53,3734.53
  Top Layer w19.68: D5.1@3630,2455 v1(3630,2505)
  Bottom Layer w7.87: v1(3495,3735) 3645,3735 3730,3650 3730,3375 3682.5,3327.5 3682.5,2557.5 v1(3630,2505)
DGND: C16.2 C17.2 C18.2 C19.1 D4.K LR1.2 M1.3 M2.4 P3.5 P4.4 Q1.2 Q2.2 R16.1 R28.2 U5.3 U6.1 U7.2 U8.3 USB1.4 USB1.8 | length 2411.2
  Top Layer w19.68: v1(2275,3165) D4.K 2339.68,3214.68 2375,3250 LR1.2@2670,3250 ; C19.1 2610.12,2454.88 2633.74,2431.26 C18.2 ; R28.2 2675,3120 LR1.2 ; v1@3100,2965 Q2.2@3128.39,2965 ; v1(3620,3120) 3620,3055 v1(3635,3040) ; v1(3640,2965) 3730,2965 3765,3000 3765,3020 3715,3070 v1(3715,3140) ; v1(3940,2300) Q1.2@3971.81,2300 ; v1(4160,2860) U8.3@4236.93,2860 ; v1(4170,3085) U5.3@4241.93,3085
  Bottom Layer w19.68: v1@3635,2970 v1(3635,3040) ; M1.3 3778.86,3358.86 3715,3295 v1(3715,3140) 4115,3140 v1(4170,3085)
  other v1: 2660,2370 2500,2375 2610.12,2580 2915,2605 3090,2965 3740,2975
I2C1_SCL: P3.1 R4.2 R7.1 R32.2 U7.6 | length 1362.7
  Top Layer w19.68: P3.1 2120,3005 2410,2715 v1(2410,2650) R32.2 2460.63,2649.05 U7.6 ; R4.2 R7.1
  Bottom Layer w19.68: v1(2410,2650) 2410,2690 2490,2770 2695.31,2770 v1(2815,2889.69)
I2C1_SDA: P3.2 R5.2 R8.1 R31.2 U7.1 | length 1563.7
  Top Layer w19.68: P3.2 2295,3025 2440,3025 2495,2970 2495,2925 2530.31,2889.69 2665.31,2889.69 2819.49,2735.51 R31.2 ; 2365,2470 v1(2365,2680) ; v1(2420,2810) 2525,2810 2555,2840 R8.1@2555,2889.69
  Bottom Layer w19.68: v1(2365,2680) 2365,2755 v1(2420,2810)
MCUGND: C9.1 C11.1 C12.2 C13.2 C14.2 C15.2 key1.1 R6.1 R9.2 R16.2 U2.8 U2.23 U2.35 U2.47 | length 64.8
  Top Layer w19.68: key1.1@2420,2900.22 v1(2420,2965)
NetC1_1: C1.1 U1.4 | length 286
  Top Layer w11.81: C1.1 3009.68,4745 3140,4745 3157.4,4727.6 U1.4
NetC1_2: C1.2 U1.1 | length 154.9
  Top Layer w11.81: C1.2 2969.8,4584.88 U1.1
NetC2_1: C2.1 C3.1 D3.2 L1.1 R3.1 U1.3 | length 1344.5
  Top Layer w19.68: D3.2@2545,4425 C3.1 R3.1 v1(2640,4575) ; C2.1 v1(2840,4570) 2915,4495 3110,4495 3157.4,4542.4 U1.3 ; L1.1 3215,4410.32 3215,4525 U1.3@3157.4,4582.6
  Bottom Layer w19.68: v1(2640,4575) 2645,4570 v1(2840,4570)
NetC2_2: C2.2 D1.2 R2.2 | length 342.9
  Top Layer w11.81: D1.2@2740,4400 R2.2 2750,4620 2805.31,4675.31 C2.2
NetC3_2: C3.2 R2.1 R3.2 U1.2 | length 798.8
  Top Layer w11.81: C3.2 R2.1 2789.37,4730 2865,4730 2890,4705 2890,4580 2945,4525 3095,4525 3120,4550 U1.2
NetC4_1: C4.1 D2.2 U1.5 | length 811.5
  Top Layer w11.81: U1.5 3082.6,4677.4 3115,4645 3185,4645 D2.2@3283.62,4743.62 ; D2.2 D2.2@3320,4743.62
  Top Layer w19.68: D2.2@3320,4743.62 3331.38,4743.62 3540,4535 3540,4374.21 C4.1
NetC7_1: C7.1 R11.1 U3.2 | length 874.5
  Top Layer w19.68: C7.1 3695,4180 3720,4155 3995,4155 4045,4105 4045,4065 4070,4040 R11.1 ; U3.2 4155,4255 4185,4225 4185,4095 4164.96,4074.96 R11.1
NetC8_2: C8.2 R14.1 U3.3 | length 265.9
  Top Layer w11.81: C8.2 R14.1@3940,4209.96
  Top Layer w19.68: R14.1 3954.96,4205 U3.3@4067.64,4205 ; U3.3@4082.64,4205 U3.3@4092.64,4195
NetC10_1: C10.1 R20.1 R21.1 U3.4 | length 867.5
  Top Layer w19.68: v1(4100,4110) U3.4@4100,4152.64 ; R20.1 R21.1 ; v1(4230,4440) C10.1@4300,4440
  Bottom Layer w19.68: v1(4100,4110) 4175,4185 4175,4385 v1(4230,4440) 4155,4515 v1(4155,4680)
NetD2_1: D2.1 R1.2 | length 176.2
  Top Layer w19.68: D2.1 3370.63,4520 R1.2
NetD4_A: D4.A R12.1 | length 114.7
  Top Layer w19.68: D4.A@2390,3165 R12.1
NetD5_2: D5.2 R15.2 | length 238
  Top Layer w19.68: D5.2 3915,2450 3945,2420 R15.2
NetD6_1: D6.1 K1.1 Q1.3 | length 645.5
  Top Layer w19.68: v1(4105.79,2190.79) Q1.3 4020,2145 4130,2035 D6.1
  Bottom Layer w19.68: v1(4105.79,2190.79) 4220,2305 K1.1
NetF1_2: F1.2 USB1.1 | length 200.7
  Top Layer w39.37: F1.2 2429.96,3531.22 USB1.1@2443.74,3545
NetF2_2: F2.2 USB1.5 | length 624.6
  Top Layer w39.37: USB1.5 2544.09,3980 2899.96,3980 F2.2
NetK1_3: K1.3 P1.2 | length 169
  Bottom Layer w98.43: P1.2 4830,2050
NetLS1_2: LS1.2 Q2.3 | length 343.1
  Top Layer w19.68: Q2.3 3430,3000 3520,2910 LS1.2@3520,2895
NetP1_1: P1.1 R11.2 R13.1 | length 3659.9
  Top Layer w11.81: R11.2 4250.04,4025 v1(4300,4025)
  Top Layer w78.74: R13.1@4800.98,4105 R13.1@4800.98,4215 ; v2(4865.98,4100) v2(4865.98,4210)
  Bottom Layer w11.81: v1(4300,4025) 4345,3980 4760,3980 4800.98,4020.98 v2(4800.98,4100)
  Bottom Layer w98.43: P1.1@4660.91,1884.09 4565,1980 4565,2780 4955,3170 4955,4025 4840,4140 ; v2@4800,4105 v2@4800,4215 ; 4835,4160 v2@4855,4140 ; v2@4860,4100 v2@4860,4210
  other v2: 4800.98,4155 4865.98,4155 4800.98,4210
NetQ1_1: Q1.1 R15.1 | length 276.9
  Top Layer w19.68: v1(4055,2245) Q1.1@4055,2286.81 ; R15.1 v1(4105,2420)
  Bottom Layer w19.68: v1(4055,2245) 4055,2370 v1(4105,2420)
NetQ2_1: Q2.1 R36.2 | length 216
  Top Layer w19.68: v1(3090,3040) Q2.1@3128.19,3040 ; v1(3105,3145) R36.2 ; Q2.1 Q2.1@3142.4,3037.4
  Bottom Layer w19.68: v1(3090,3040) 3090,3130 v1(3105,3145)
NetR6_2: R6.2 U2.20 | length 213.7
  Top Layer w7.87: 3494.77,3415.23 3494.77,3360.32 3495,3360.08 U2.20@3495,3360 ; v1(3540,3110) R6.2
  Bottom Layer w7.87: 3495,3210 3540,3165 v1(3540,3110)
NetR7_2: R7.2 U2.42 | length 754.6
  Top Layer w7.87: R7.2 v1@2914.68,2950.32
  Bottom Layer w7.87: v1(2915,2950) 2915,3085 3070,3240 3245,3240 3270,3215 3370,3215 3395,3240
NetR8_2: R8.2 U2.43 | length 1209.1
  Top Layer w7.87: R8.2 v1(2560,3000) ; 3455.16,3625.16 U2.43
  Bottom Layer w7.87: v1(2560,3000) 2665,3000 2930,3265 3265,3265 3295,3235 3341.25,3235 3375,3268.75 ; 3360,3470 3360,3515 3430,3585 3440,3585
NetR17_1: R17.1 R18.2 | length 104.9
  Top Layer w19.68: R17.1 R18.2
NetR18_1: R18.1 R19.2 | length 104.9
  Top Layer w19.68: R18.1 R19.2
NetR19_1: R19.1 R20.2 | length 100
  Top Layer w19.68: R19.1 R20.2@4020,4680
NetR25_1: R25.1 U4.1 | length 184.7
  Top Layer w19.68: R25.1 4241.93,2620 U4.1
NetR26_1: R26.1 U5.1 | length 114.9
  Top Layer w19.68: U5.1@4620,2980 R26.1
NetR27_1: R27.1 R29.1 U5.4 | length 281.4
  Top Layer w11.81: R29.1 4065.61,2976.95 R27.1 4236.93,2970 U5.4
NetR30_2: R30.2 U4.2 | length 183.4
  Top Layer w19.68: R30.2 4241.93,2520 U4.2
NetR33_1: R33.1 U8.1 | length 128.9
  Top Layer w19.68: U8.1 4613.07,2760 R33.1
NetR34_1: R34.1 R35.1 U8.4 | length 287.2
  Top Layer w11.81: R35.1 4065.61,2761.95 R34.1 U8.4
NRST: C9.2 key1.2 P3.9 R10.1 U2.7
OSC32_IN: C12.1 U2.3 Y2.2 | length 673
  Top Layer w7.87: 3245,3600 3256.1,3588.9
  Top Layer w11.81: 3245,3600 3245,3745 3285,3785 3285,3855 3315,3885 Y2.2 3350,3935 3375,3960 3520,3960 3540,3940 C12.1
OSC32_OUT: C15.1 U2.4 Y2.1 | length 566.9
  Top Layer w7.87: 3220,3595 3245.79,3569.21
  Top Layer w11.81: v1(3180,3820) C15.1@3223.7,3820 ; 3220,3595 3220,3805 C15.1@3235.65,3820.65
  Bottom Layer w11.81: v1(3180,3820) v1@3434.61,3820
  other v1: 3436.61,3822.01
OSC_IN: C13.1 U2.5 Y1.1 | length 241.1
  Top Layer w8: 3140,3565 3140,3555 3145.47,3549.53 ; U2.5@3305.38,3549.53 3305.55,3549.7 U2.5
  Top Layer w10: 3140,3565 3140,3615 Y1.1
  Top Layer w19.68: C13.1 3094.68,3670.32 Y1.1
OSC_OUT: C14.1 U2.6 Y1.2 | length 421.2
  Top Layer w7.87: Y1.2 3142.4,3430.6 3142.4,3520 3152.24,3529.84 U2.6
  Top Layer w19.68: C14.1 3106.69,3389.68 Y1.2
PA8: R35.2 U2.29 | length 868.4
  Top Layer w7.87: 3674.53,3490.47 3683.35,3481.65 3683.35,3396.65
  Top Layer w10: 3683.35,3396.65 3747.28,3332.72 3747.28,3082.72 3825,3005 v1(3825,2870) ; v1(3975,2870) R35.2
  Bottom Layer w10: v1(3825,2870) v1(3975,2870)
PA9: R30.1 U2.30 | length 1143.9
  Top Layer w11.81: 3689.84,3510.16 3703.19,3496.81 3703.19,3411.81 3768.19,3346.81 3768.19,3111.81 3900,2980 3900,2595 3975,2520 R30.1
PA10: R29.2 U2.31 | length 648.2
  Top Layer w11.81: 3705.16,3529.84 3725,3510 3725,3425 3790,3360 3790,3185 3905,3070 R29.2
PB10: M2.1 P4.3 U2.21 | length 1412.5
  Top Layer w7.87: 3514.21,3304.21 U2.21
  Top Layer w11.81: v1(3465,3285) 3495,3285 3514.21,3304.21
  Bottom Layer w11.81: 2945,2490 3010,2555 3185,2555 3290,2660 3290,2975 3465,3150 v1(3465,3285) ; 3065,2075 3065,1995 P4.3
PB11: M2.8 P4.2 U2.22 | length 1515.4
  Top Layer w11.81: P4.2 3215,2095 3215,2155 3280,2220 3280,2480 v1(3225,2535)
  Top Layer w19.68: M2.8 M2.8@2990,1890
  Bottom Layer w11.81: v1(3225,2535) 3340,2650 3340,2945 3460,3065 3540,3065 3575,3100 3575,3165 3525,3215 ; 3520,3425 3525,3420
PB12: M2.7 R37.1 U2.25 | length 1459
  Top Layer w11.81: R37.1@3005,2432.53 v1(3005,2505) ; U2.25 3626.18,3410 v1(3626.18,3378.82)
  Bottom Layer w11.81: v1(3005,2505) 3275,2505 3390,2620 3390,2920 3485,3015 3560,3015 3650,3105 3650,3355 v1(3626.18,3378.82)
PF: U3.7 U8.2 | length 2795.4
  Top Layer w11.81: U3.7 4345,4255 4520,4430 5025,4430 5145,4310 5145,3145 v1@4887.5,2887.5 ; U8.2 4638.07,2885 v1@4825,2885
  Bottom Layer w11.81: v1(4820,2885) 4885,2885 v1(4890,2890)
RX: R22.1 U3.8 U4.4 | length 3224
  Top Layer w11.81: U3.8@4307.36,4300 4463.61,4456.25 5048.75,4456.25 5172.4,4332.6 5172.4,3052.4 4890,2770 4890,2615 4835,2560 4675,2560 U4.4@4630,2605 ; U4.4@4630,2630 4635,2635 R22.1
SPEAK: R36.1 U2.28 | length 342.8
  Top Layer w7.87: R36.1 3170,3210 3200,3210 v1@3210,3200 ; 3560,3470 3560.79,3470.79
  Bottom Layer w7.87: v1(3210,3210) 3225,3195 3380,3195 3415,3230 ; 3415,3430 3455.79,3470.79
SWCLK: P3.7 U2.37 | length 1485.8
  Bottom Layer w7.87: P3.7 2195,3775 2195,3870 2270,3945 2885,3945 2960,3870 2960,3820 3005,3775 3250,3775 3320,3705
SWDIO: P3.6 U2.34 | length 1116.4
  Bottom Layer w11.81: P3.6 2220,3700 3195,3700
TX: U3.6 U5.2 | length 2408.4
  Top Layer w11.81: U3.6 4360,4205 4520,4365 4955,4365 5080,4240 5080,3275 4885,3080 U5.2
USART2_RX: P3.3 U2.13 | length 1274.7
  Top Layer w11.81: v1(3315,3315) 3315,3340 3335.55,3360.55 U2.13@3355,3360.55
  Bottom Layer w11.81: P3.3 3300,3300 v1(3315,3315)
USART2_TX: P3.4 U2.12 | length 1229.5
  Top Layer w11.81: v1(3290,3365) U2.12@3290,3410
  Bottom Layer w11.81: P3.4 2880,3400 2915,3365 v1(3290,3365)
VBAT: U2.1
pads on no net: M1.4 M2.2 M2.3 M2.6 U2.2 U2.10 U2.14 U2.15 U2.16 U2.17 U2.19 U2.26 U2.27 U2.32 U2.33 U2.38 U2.39 U2.40 U2.45 U2.46 U7.0 U7.3 U7.4 USB1.0 USB1.2 USB1.3 USB1.6 USB1.7 Y2.GND

## Polygon pours and split planes (outlines as drawn)
MCUGND on Top Layer "Keep-Out Layer-No Net" (solid, remove dead copper, shelved, pour order 10): 2951.94,4014.29 3716.94,4014.29 3716.94,3169.29 2951.94,3169.29
MCUGND on Top Layer "Keep-Out Layer-No Net" (solid, remove dead copper, shelved, pour order 14): 2935,4030 3715,4030 3715,3180 3710,3175 2935,3175
MCUGND on Top Layer "Keep-Out Layer-No Net" (solid, remove dead copper, shelved, pour order 18): 2890,3980 3725,3980 3725,3095.08 2905.22,3095.08 2890.04,3080
MCUGND on Top Layer "Keep-Out Layer-No Net" (solid, remove dead copper, shelved, pour order 22): 3690,3185 3690,3975 2945,3975 2945,3170
MCUGND on Bottom Layer "Keep-Out Layer-No Net" (solid, remove dead copper, shelved, pour order 8): 2946.73,4015.65 3707.1,4015.65 3711.73,4010.65 3711.73,3170.65 2946.73,3170.65
MCUGND on Bottom Layer "Keep-Out Layer-No Net" (solid, remove dead copper, shelved, pour order 12): 2935,4030 3715,4030 3715,3175 2935,3175
MCUGND on Bottom Layer "Keep-Out Layer-No Net" (solid, remove dead copper, shelved, pour order 16): 2865,4015 3710,4015 3715,4010 3715,3115 2860,3115
MCUGND on Bottom Layer "Keep-Out Layer-No Net" (solid, remove dead copper, shelved, pour order 20): 2945,3975 3690,3975 3690,3185 2945,3185

## Keep-outs
Keep-Out Layer:
  lines w7.87: 3207.32,1730 2045,1730 2045,4819.41 5194.61,4819.41 5194.61,1730 4032.32,1730 4032.32,1925.71 ; 3207.36,1730.04 3207.36,1925.71 ; 3830,3190 3830,3950 4785,3950 4785,3400 4735,3350 4735,3190 3830,3190
  lines w10: 3207.36,1925.71 cw(c3619.84,1926.42) 4032.32,1925.71

## Silkscreen, mask and mechanical layers (free items; w line width, h text height)
Top Overlay:
  text "AC~IN" at 4935,4770 h39.37 r180
  text "NRST" at 2185,3990 h31.5 r270
  text "3V3" at 2185,3850 h31.5 r270
  text "CLK" at 2185,3745 h31.5 r270
  text "DIO" at 2185,3640 h31.5 r270
  text "GND" at 2185,3535 h31.5 r270
  text "TX" at 2185,3420 h31.5 r270
  text "RX" at 2185,3325 h31.5 r270
  text "SDA" at 2185,3240 h31.5 r270
  text "SCL" at 2185,3130 h31.5 r270
  text "3V3" at 3075,2090 h31.5 r90
  text "RX" at 3080,2000 h31.5 r90
  text "TX" at 3080,1895 h31.5 r90
  text "AC~OUT" at 4950,1785 h39.37
  text "GND" at 3080,1770 h31.5 r90
Top Solder:
  lines w94.49: 4480.98,4100 4480.98,4215 ; 4545.98,4120.98 4545.98,4215 ; 4810,4110 4810,4205 ; 4855,4100 4855,4215
Bottom Solder:
  lines w94.49: 4480,4114.02 4480,4690.99 ; 4480.98,4215.98 4485,4110 ; 4545.98,4105 4545.98,4215 ; 4565,2780 4565,1980 4664.01,1880.99 ; 4565,3010 4570,3015 ; 4570,2785 4955,3170 4955,3175 4955,4025 4855,4125 ; 4645,4646 4659,4646 5130,4175 5130,2960 4820,2650 4820,2396.22 ; 4720,2097.64 4732.36,2085.28 4830,2085.28 4830,1881 ; 4800,4220 4801.07,4100 ; 4850,4120 4850,4215